# Altium PCB F4Test.PcbDoc
Units mil, origin at the board's own origin, x right, y up, seen from the top; angles counter-clockwise.
Board outline 1968.5 x 1968.5 mil, 4 copper layers (Top Layer, Internal Plane 1, Signal Layer 1, Bottom Layer), stack 64.634 mil thick; 127 components, 112 nets, 491 pads, 159 vias.
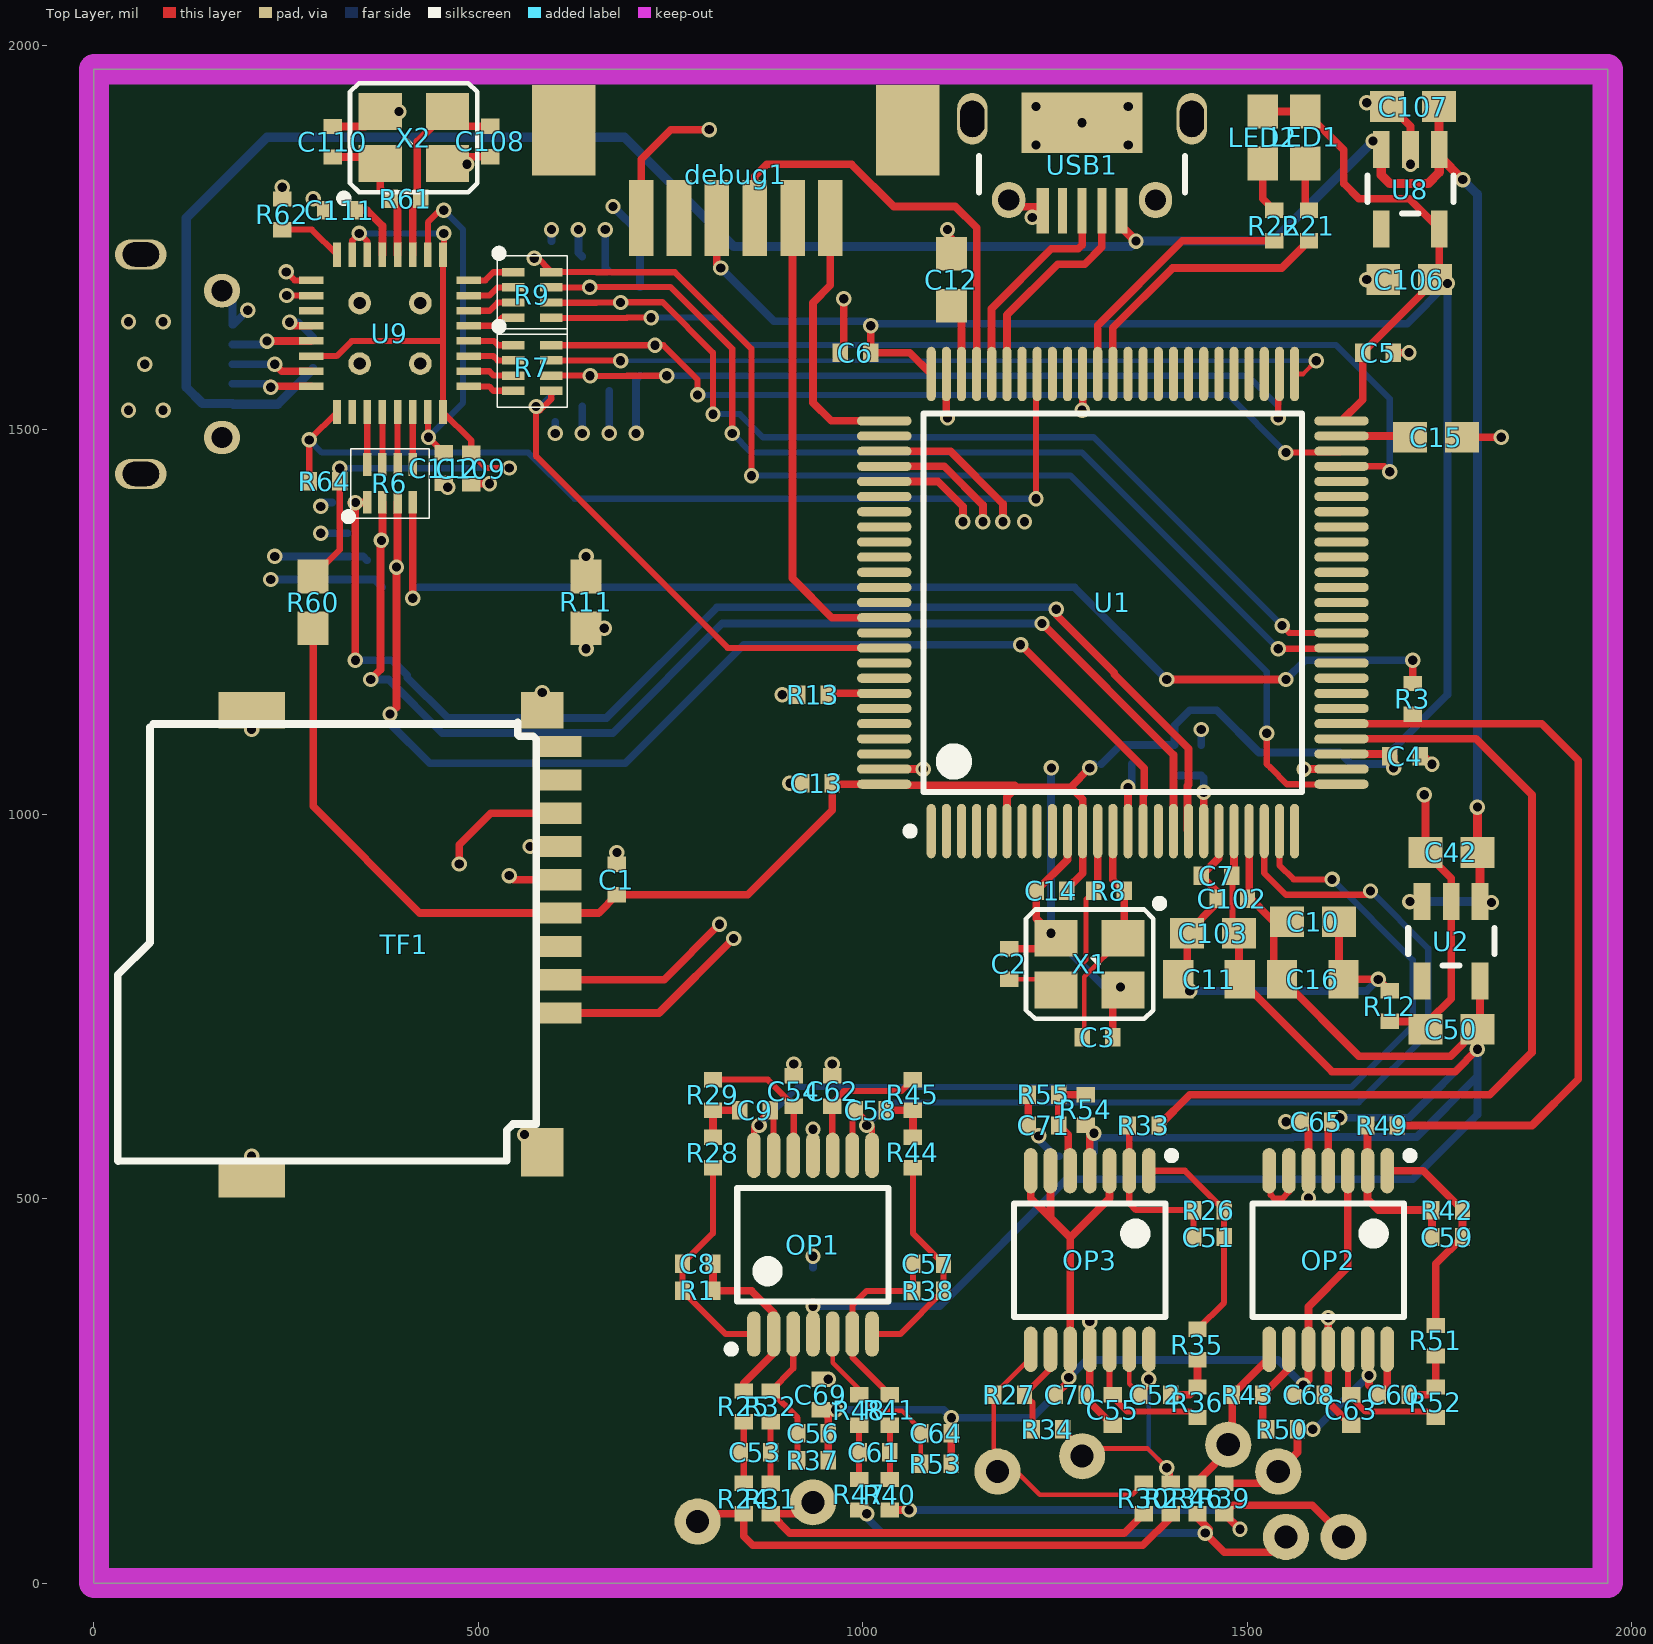
[diagram p0: Top Layer view]
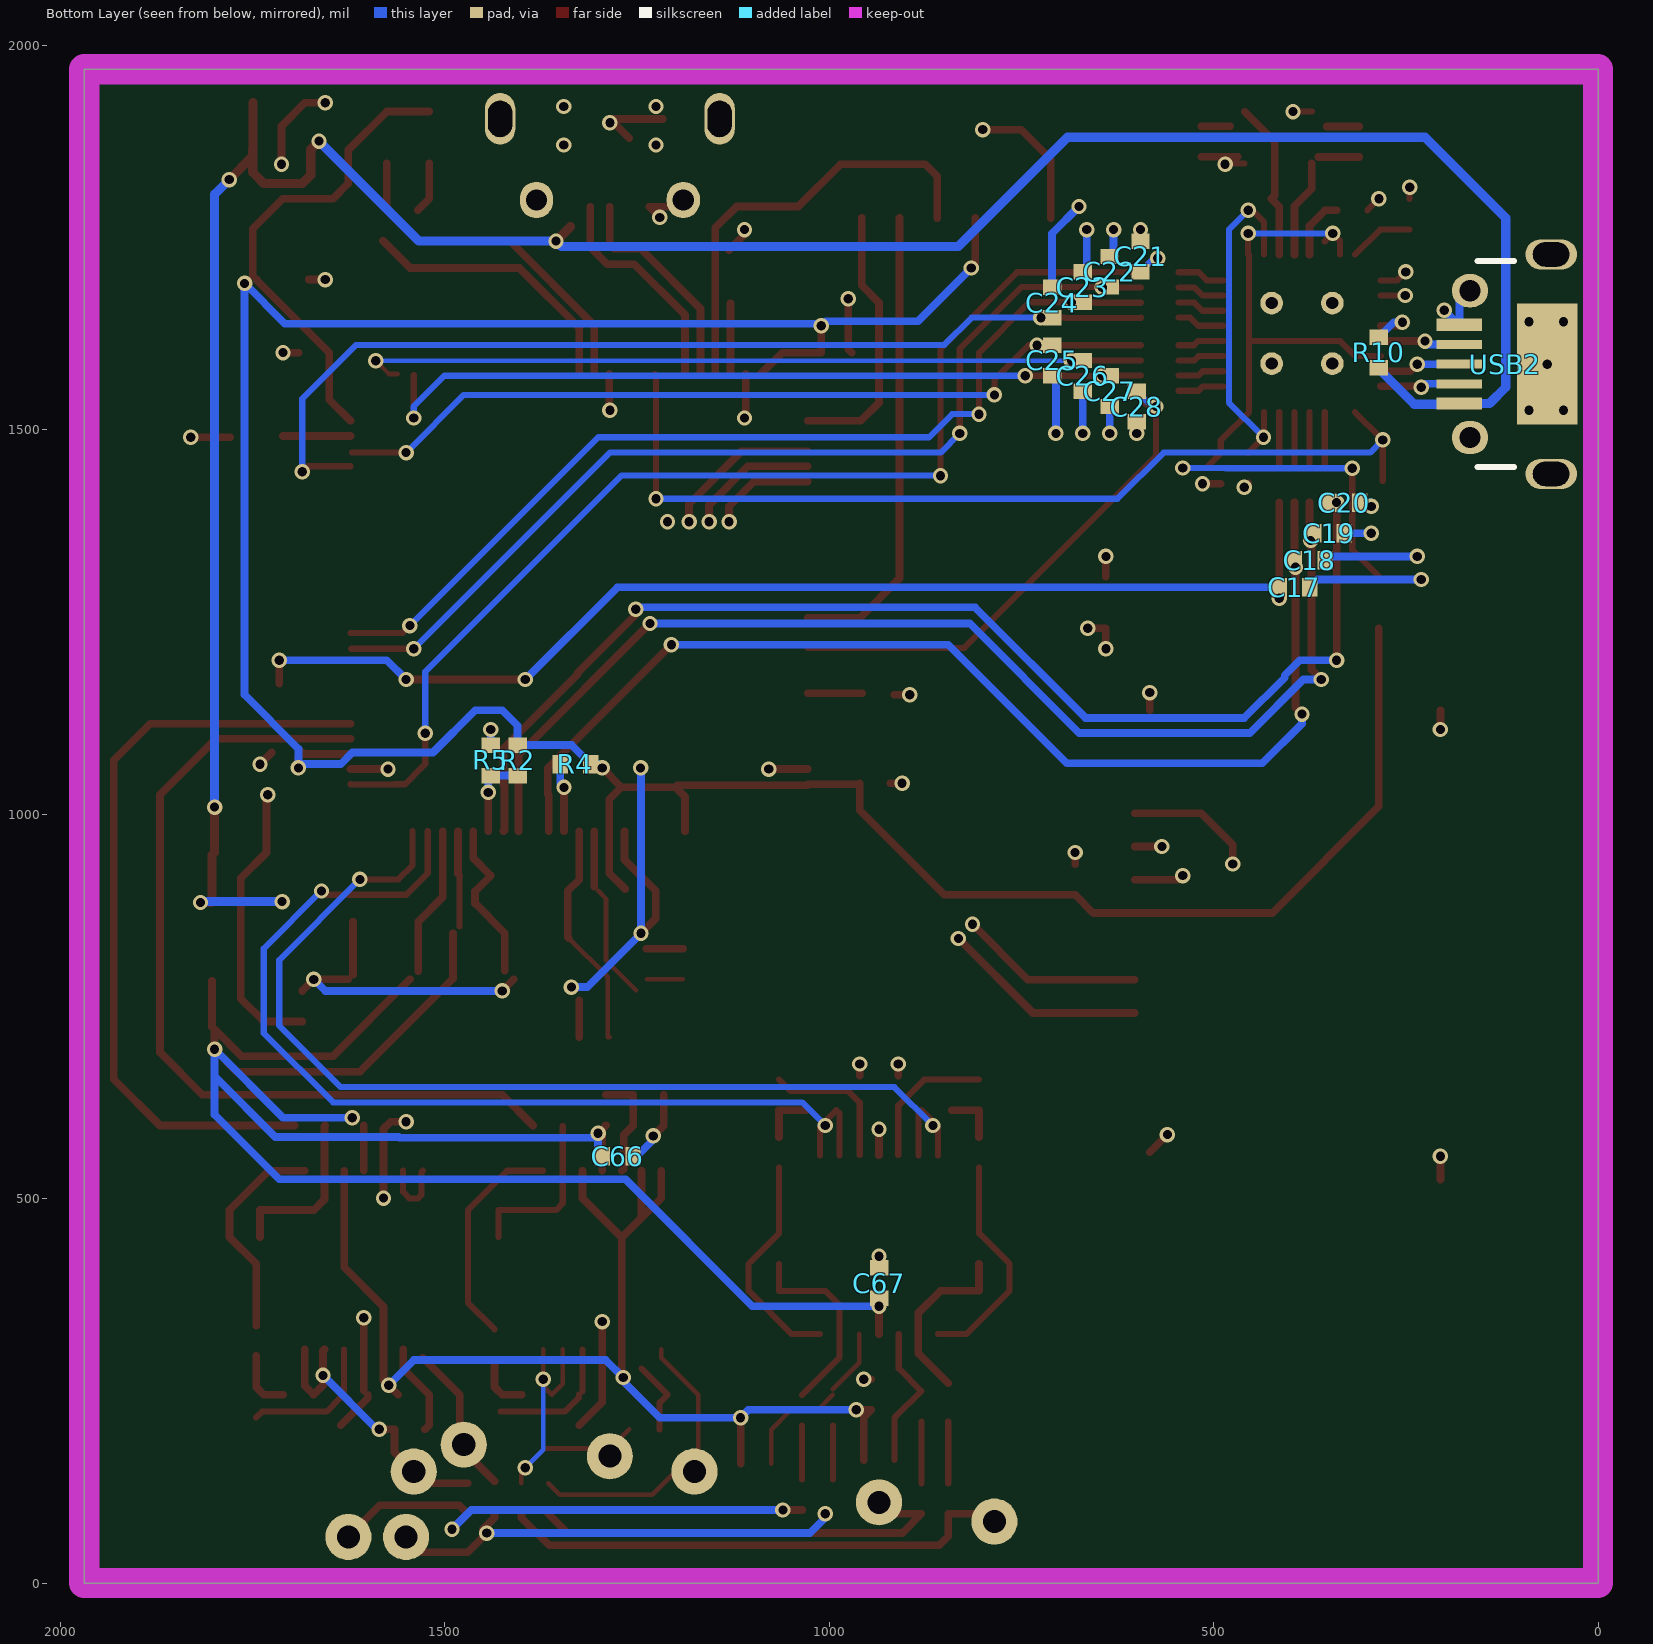
[diagram p1: Bottom Layer view, seen from below]
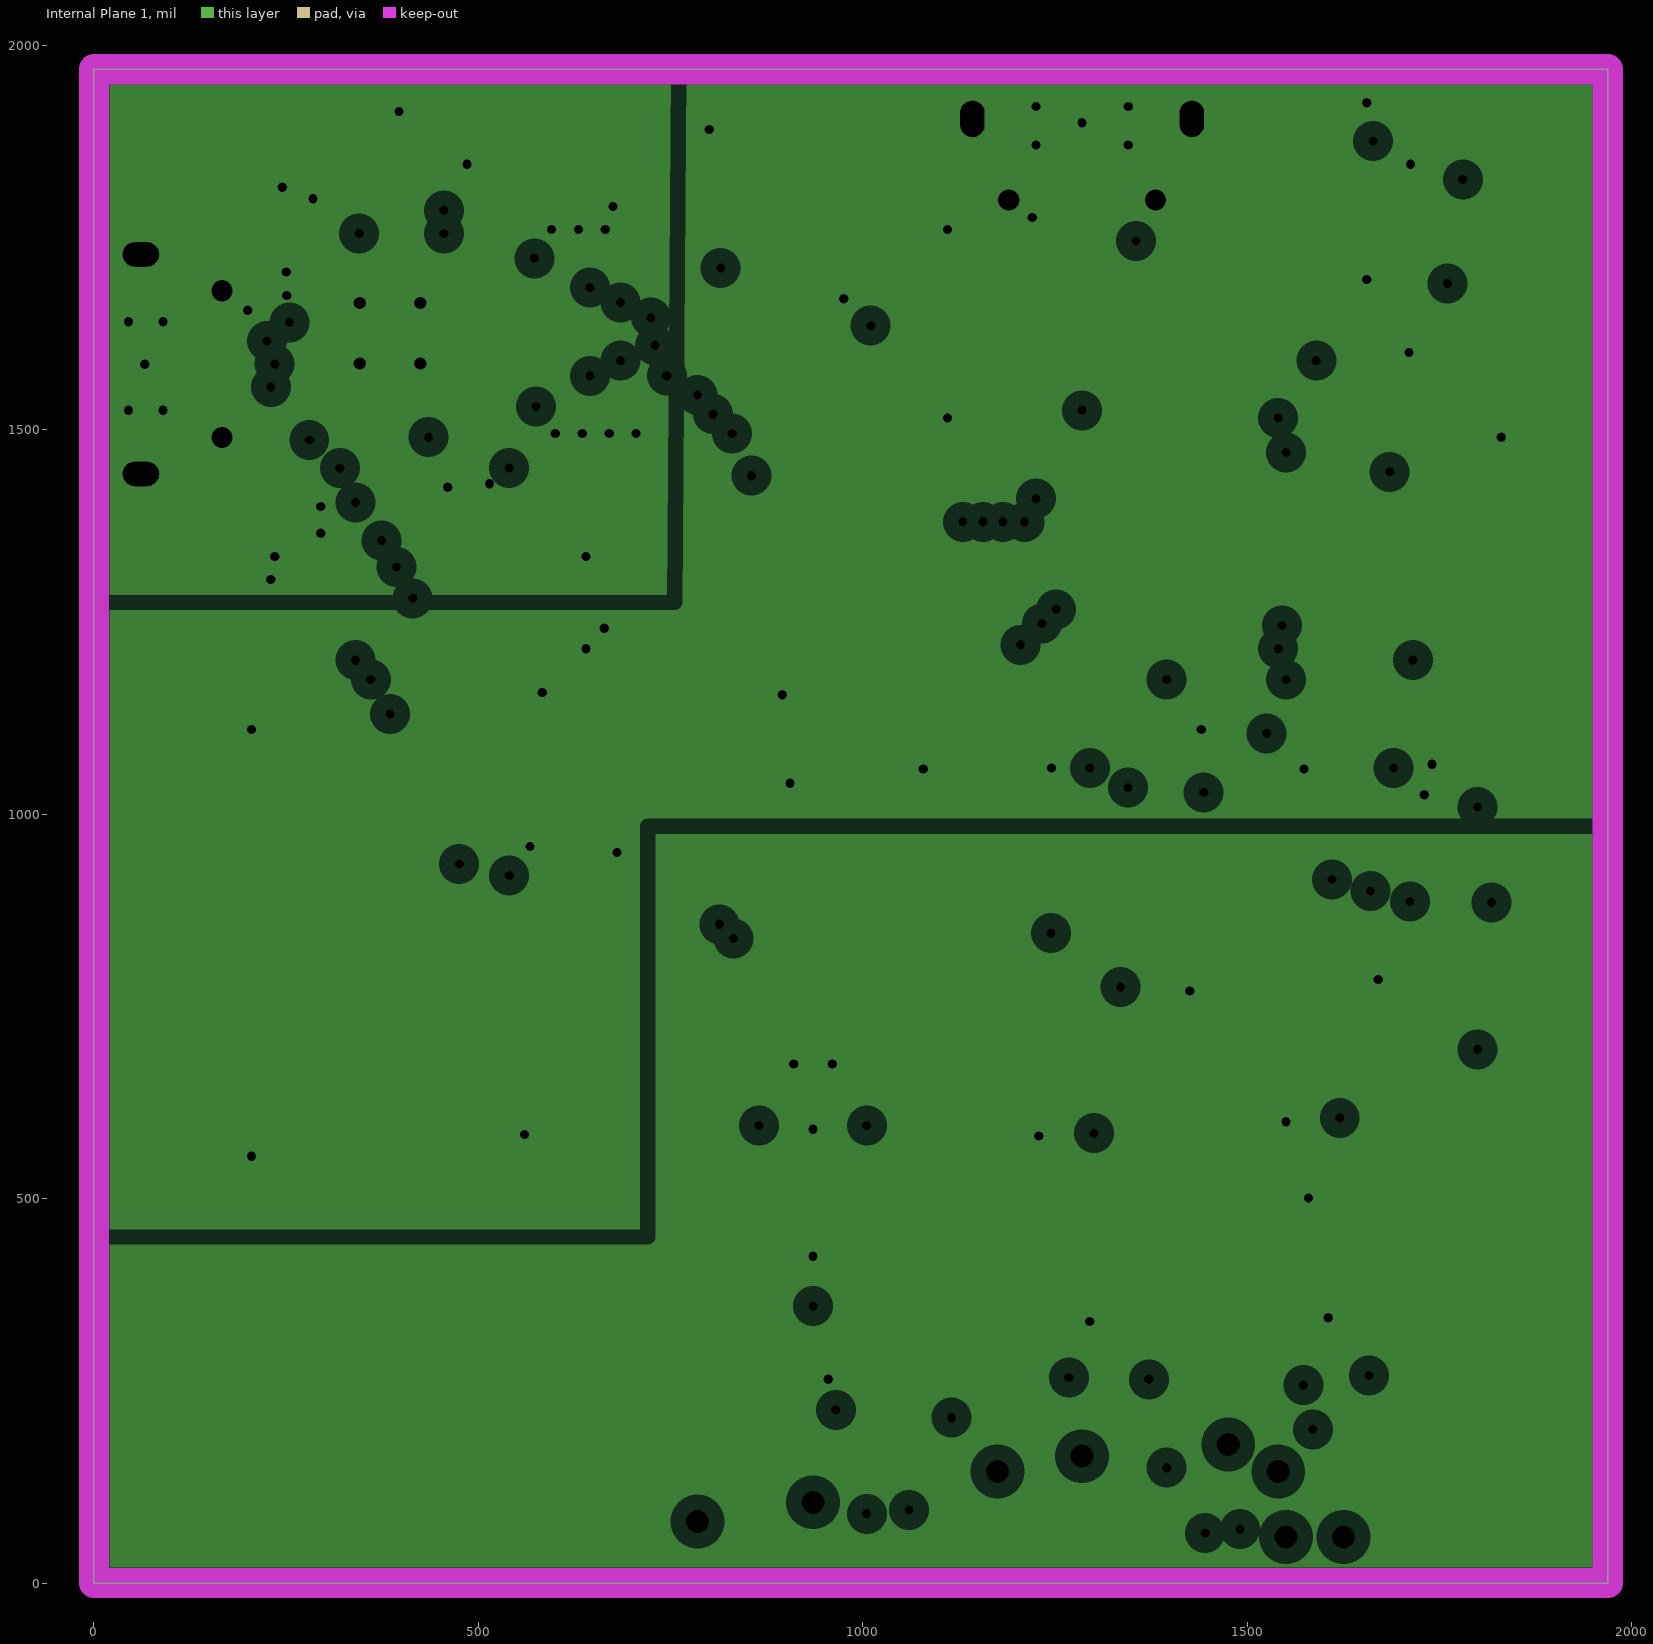
[diagram p2: Internal Plane 1, clearances drawn from the general rule]
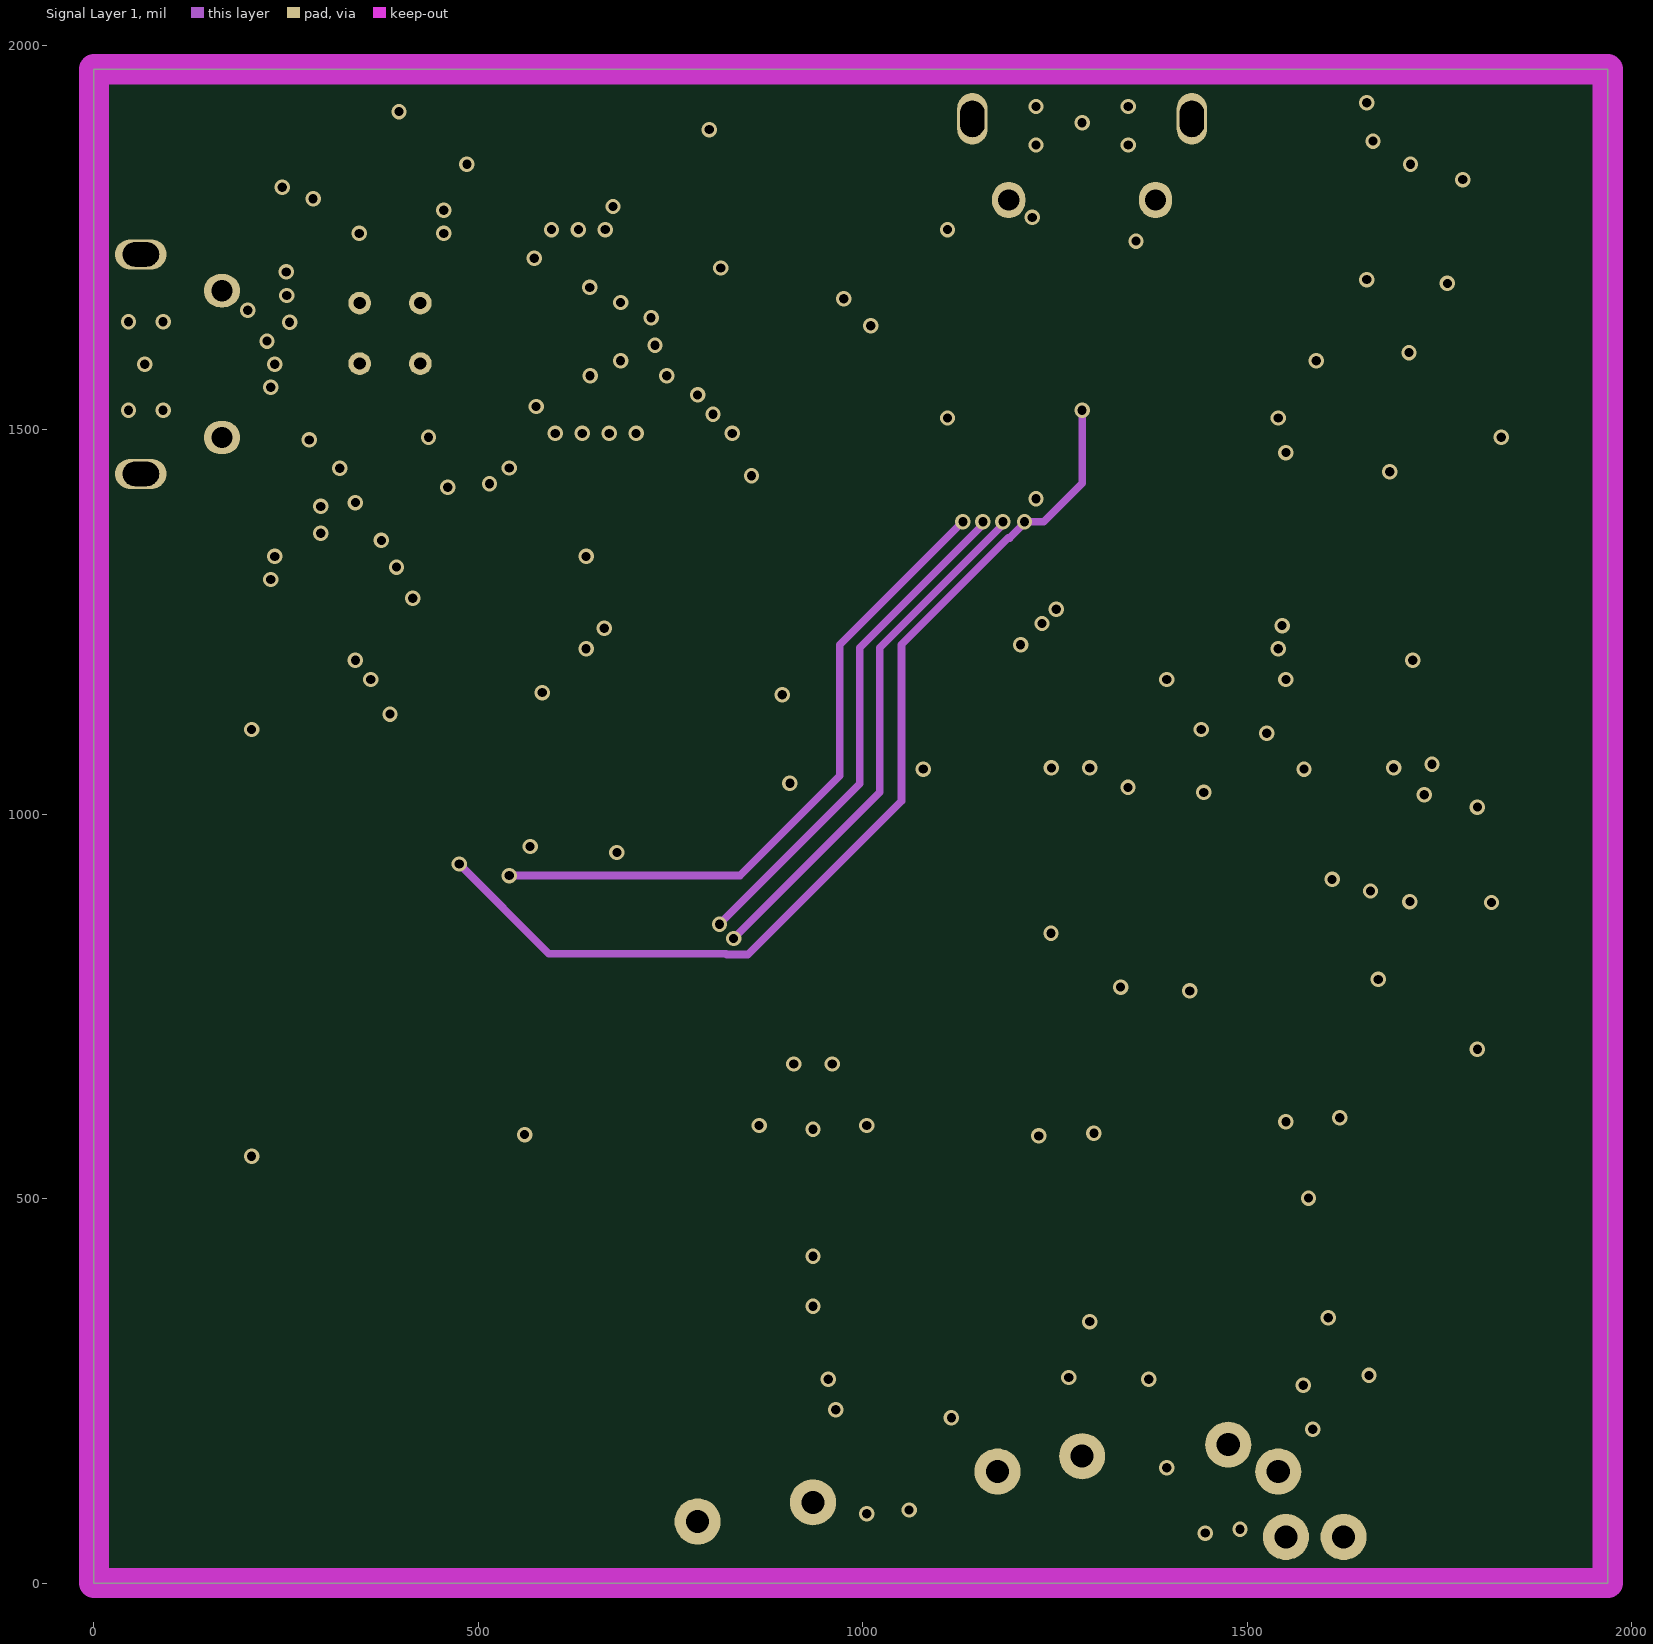
[diagram p3: Signal Layer 1]

## Layer stack, top to bottom
Top Solder: solder mask 0.4, Solder Resist, Dk 3.5
Top Layer: signal copper 1.4
Dielectric 1: core 6, FR-4, Dk 4.2
Internal Plane 1: plane copper 1.4169, net (Multiple Nets)
Dielectric 3: prepreg 47, Dk 4.2
Signal Layer 1: signal copper 1.4169
Dielectric 2: core 6, Dk 4.2
Bottom Layer: signal copper 1.4
Bottom Solder: solder mask 0.4, Solder Resist, Dk 3.5

## Board outline
0,0 1968.5,0 1968.5,1968.5 0,1968.5

## Design rules (kind name [scope] priority, off if disabled: settings)
Clearance [All] p1: gap=6
DiffPairsRouting [All] p1: maxlimit=10 minlimit=10 mostfreqgap=10 toplayer_minwidth=6 toplayer_maxwidth=15 toplayer_prefwidth=15 midlayer1_minwidth=6 midlayer1_maxwidth=15 midlayer1_prefwidth=15 bottomlayer_minwidth=6 bottomlayer_maxwidth=15 bottomlayer_prefwidth=15 maxuncoupledlength=500
MinimumSolderMaskSliver [All] p1 off: minsoldermaskwidth=10
PlaneClearance [All] p1: clearance=20
PlaneConnect [All] p1: planeconnectstyle=Direct reliefexpansion=20 reliefentries=4 reliefconductorwidth=10 reliefairgap=10
PolygonConnect [All] p1: connectstyle=Direct reliefconductorwidth=10 reliefentries=4 polygonreliefangle="90 Angle" airgapwidth=10
RoomDefinition mcu2 [InComponentClass('mcu2')] p1 off: confinementstyle=ConfineIn formatcopy=TRUE lockcomponents=FALSE outline 4045,-40 11430,-40 11430,360 4045,360
RoomDefinition USB_HS2 [InComponentClass('USB_HS2')] p2 off: confinementstyle=ConfineIn formatcopy=TRUE lockcomponents=FALSE outline 4090,1500 6900,1500 6900,3220 4090,3220
RoomDefinition IF [InComponentClass('IF')] p3 off: confinementstyle=ConfineIn formatcopy=TRUE lockcomponents=FALSE outline 4065,-2940 10325,-2940 10325,-1750 4065,-1750
RoutingVias [All] p1: holewidth=12 width=20 viastyle="Through Hole" minholewidth=12 minwidth=20 maxholewidth=28 maxwidth=50
SilkToBoardRegionClearance [All] p1 off:
SilkToSilkClearance [All] p1 off: silktosilkclearance=10
SilkToSolderMaskClearance [IsPad] p1 off: minsilkscreentomaskgap=10 clearancetoexposedcopper=TRUE
SolderMaskExpansion [All] p1: expansion=4
UnpouredPolygon [All] p1: allowunpoured=FALSE
Width [All] p1: maxlimit=60 minlimit=6 preferedwidth=6
22 further rules are at their usual default settings.

## Classes and differential pairs
component class USB_HS2: C17 C18 C19 C20 C21 C22 C23 C24 C25 C26 C27 C28 C108 C109 C110 C111 C112 R6 R7 R9 R10 R11 R60 R61 R62 R64 U9 USB2 X2
component class mcu2: C1 C2 C3 C4 C5 C6 C7 C10 C11 C12 C13 C14 C15 C16 C42 C50 C102 C103 C106 C107 debug1 LED1 LED2 R2 R3 R4 R5 R8 R12 R13 R21 R22 TF1 U1 U2 U8 USB1 X1
component class IF: C8 C9 C51 C52 C53 C54 C55 C56 C57 C58 C59 C60 C61 C62 C63 C64 C65 C66 C67 C68 C69 C70 C71 OP1 OP2 OP3 R1 R23 R24 R25 R26 R27 R28 R29 R30 R31 R32 R33 R34 R35 R36 R37 R38 R39 R40 R41 R42 R43 R44 R45 R46 R47 R48 R49 R50 R51 R52 R53 R54 R55
differential pair USB: +USB_P -USB_N

## Components (designator, comment, footprint, x,y, rotation, side; value= is the part's Value field where it differs from the comment)
C1 "0.1uF" 0402 680,915 r270 top
C2 "22pF" 0402 1190,805 r90 top
C3 "22pF" 0402 1305,710 r0 top
C4 "0.1uF * 5" 0402 1705,1075 r180 top
C5 "1n" 0402 1670,1600 r180 top
C6 "1n" 0402 990,1600 r0 top
C7 "1n" 0402 1460,920 r180 top
C8 "22pF" 0402 785,415 r0 top
C9 "430pF" 0402 860,615 r180 top
C10 "2.2uF" 0603 1585,860 r0 top
C11 "4.7uF" 0805 1450,785 r0 top
C12 "2.2uF" 0603 1115,1695 r270 top
C13 "1n" 0402 940,1040 r0 top
C14 "1n" 0402 1245,900 r0 top
C15 "2.2uF" 0603 1745,1490 r0 top
C16 "4.7uF" 0805 1585,785 r0 top
C17 "10pF/NC" 0402 395,1295 r180 bottom
C18 "1n" 0402 375,1330 r180 bottom
C19 "1n" 0402 350,1365 r180 bottom
C20 "1n" 0402 330,1405 r180 bottom
C21 "10pF/NC" 0402 595,1725 r90 bottom
C22 "1n" 0402 635,1705 r90 bottom
C23 "1n" 0402 670,1685 r90 bottom
C24 "1n" 0402 710,1665 r90 bottom
C25 "10pF/NC" 0402 710,1590 r270 bottom
C26 "1n" 0402 670,1570 r270 bottom
C27 "1n" 0402 635,1550 r270 bottom
C28 "1n" 0402 600,1530 r270 bottom
C42 "4.7uF" 0603 1765,950 r0 top
C50 "4.7uF" 0603 1765,720 r0 top
C51 "22pF" 0402 1450,450 r180 top
C52 "430pF" 0402 1380,245 r0 top
C53 "22pF" 0402 860,170 r0 top
C54 "100pF" 0402 910,640 r270 top
C55 "100pF" 0402 1325,225 r90 top
C56 "22pF" 0402 935,195 r0 top
C57 "22pF" 0402 1085,415 r180 top
C58 "430pF" 0402 1010,615 r0 top
C59 "22pF" 0402 1760,450 r180 top
C60 "430pF" 0402 1690,245 r0 top
C61 "22pF" 0402 1015,170 r180 top
C62 "100pF" 0402 960,640 r270 top
C63 "100pF" 0402 1635,225 r90 top
C64 "22pF" 0402 1095,195 r0 top
C65 "0.1uF" 0402 1590,600 r180 top
C66 "0.1uF" 0402 1275,555 r180 bottom
C67 "0.1uF" 0402 935,390 r90 bottom
C68 "0.1uF" 0402 1580,245 r0 top
C69 "0.1uF" 0402 945,245 r90 top
C70 "0.1uF" 0402 1270,245 r0 top
C71 "0.1uF" 0402 1235,595 r180 top
C102 "1n" 0402 1480,890 r0 top
C103 "2.2uF" 0603 1455,845 r0 top
C106 "4.7uF" 0603 1710,1695 r0 top
C107 "4.7uF" 0603 1715,1920 r0 top
C108 "10pF" 0402 515.63,1874.37 r90 top
C109 "1uF" 0402 490.63,1449.37 r270 top
C110 "10pF" 0402 310.63,1874.37 r270 top
C111 "1uF" 0402 320,1785 r180 top
C112 "1uF" 0402 455,1450 r270 top
debug1 "debug" WFRSM125 810,1775 r180 top
LED1 "LED0" 0603 1575,1880 r270 top
LED2 "LED0" 0603 1520,1880 r270 top
OP1 "MCP6024" TSSOP14_44MM_065P 935,440 r90 top
OP2 "MCP6024" TSSOP14_44MM_065P 1605,420 r270 top
OP3 "MCP6024" TSSOP14_44MM_065P 1295,420 r270 top
R1 "10k" 0402 785,380 r0 top
R2 "0R" 0402 1405,1070 r270 bottom
R3 "0R" 0402 1715,1150 r270 top
R4 "10k" 0402 1330,1065 r180 bottom
R5 "NC" 0402 1440,1070 r270 bottom
R6 "Res*4" 0402X4 385,1430 r90 top
R7 "Res*4" 0402X4 570,1580 r0 top
R8 "" 0402 1320,900 r180 top
R9 "Res*4" 0402X4 570,1675 r0 top
R10 "10k" 0402 285,1600 r90 bottom
R11 "0R" 0603 640,1275 r90 top
R12 "0R" 0402 1685,750 r90 top
R13 "10k" 0402 935,1155 r0 top
R21 "10k" 0402 1580,1765 r90 top
R22 "10k" 0402 1535,1765 r90 top
R23 "NC" 0402 1400,110 r90 top
R24 "5k" 0402 845,110 r270 top
R25 "5k" 0402 845,230 r270 top
R26 "10k" 0402 1450,485 r180 top
R27 "1k" 0402 1190,245 r0 top
R28 "787R" 0402 805,560 r270 top
R29 "1.33k" 0402 805,635 r270 top
R30 "NC" 0402 1365,110 r90 top
R31 "5k" 0402 880,110 r270 top
R32 "5k" 0402 880,230 r270 top
R33 "5k" 0402 1365,595 r0 top
R34 "1k" 0402 1240,200 r0 top
R35 "787R" 0402 1435,310 r90 top
R36 "1.33k" 0402 1435,235 r90 top
R37 "10k" 0402 935,160 r180 top
R38 "10k" 0402 1085,380 r180 top
R39 "NC" 0402 1470,110 r90 top
R40 "5k" 0402 1035,115 r270 top
R41 "5k" 0402 1035,225 r270 top
R42 "10k" 0402 1760,485 r180 top
R43 "1k" 0402 1500,245 r0 top
R44 "787R" 0402 1065,560 r270 top
R45 "1.33k" 0402 1065,635 r270 top
R46 "NC" 0402 1435,110 r90 top
R47 "5k" 0402 995,115 r270 top
R48 "5k" 0402 995,225 r270 top
R49 "5k" 0402 1675,595 r0 top
R50 "1k" 0402 1545,200 r0 top
R51 "787R" 0402 1745,315 r90 top
R52 "1.33k" 0402 1745,235 r90 top
R53 "10k" 0402 1095,155 r180 top
R54 "5k" 0402 1290,615 r90 top
R55 "5k" 0402 1235,635 r180 top
R60 "FB" 0603 285,1275 r90 top
R61 "1MR" 0402 405,1800 r0 top
R62 "12k 1%" 0402 245,1780 r270 top
R64 "10k" 0402 300,1432.95 r180 top
TF1 "TF" TF 205,1135 r270 top
U1 "STM32F427VGT6" LQFP100_N 1325,1275 r90 top
U2 "LP5907" SOT23-5 1765,835 r180 top
U8 "RT9193/RT9013/LP5907" SOT23-5 1712,1813 r180 top
U9 "USB3300_1" USB3300 385,1625 r0 top
USB1 "USB Micro Type B" MICRO-YZX 1285,2015 r180 top
USB2 "USB Micro Type B" MICRO-YZX -50,1585 r90 bottom
X1 "8mhz" OSCILLATOR-3.2X2.5 1295,805 r180 top
X2 "24mhz" OSCILLATOR-3.2X2.5 415.63,1879.37 r0 top

## Footprints (in the part's own frame and the unit in brackets; to place one, negate y for a bottom-side part, rotate by r counter-clockwise, add the part's x,y. Pads: shape width x height; smd on the part's side, far side on the other; paste and mask are expansions set on the pad)
0402 [mil] "0402-RES"
  rect 20x24 smd: 1(-19.68,0) 2(20,0)
0402X4 [mm]
  rect 0.75x0.28 smd: 1(-0.625,0.75) 2(-0.625,0.25) 3(-0.625,-0.25) 4(-0.625,-0.75) 5(0.625,-0.75) 6(0.625,-0.25) 7(0.625,0.25) 8(0.625,0.75)
  silkscreen extent -1.22,-1.3 1.15,1.5
0603 [mil] "0603-RES"
  rect 44x40 smd: 1(-33.46,0) 2(34,0)
0805 [mil]
  rect 39.37x50 smd: 1(-40,0) 2(40,0)
  body extent -50,-30 50,30, height 31
LQFP100_N [mm]
  oval 1.8x0.3 smd: 1(-7.55,6) 2(-7.55,5.5) 3(-7.55,5) 4(-7.55,4.5) 5(-7.55,4) 6(-7.55,3.5) 7(-7.55,3) 8(-7.55,2.5) 9(-7.55,2) 10(-7.55,1.5) 11(-7.55,1) 12(-7.55,0.5) 13(-7.55,0) 14(-7.55,-0.5) 15(-7.55,-1) 16(-7.55,-1.5) 17(-7.55,-2) 18(-7.55,-2.5) 19(-7.55,-3) 20(-7.55,-3.5) 21(-7.55,-4) 22(-7.55,-4.5) 23(-7.55,-5) 24(-7.55,-5.5) 25(-7.55,-6) 51(7.55,-6) 52(7.55,-5.5) 53(7.55,-5) 54(7.55,-4.5) 55(7.55,-4) 56(7.55,-3.5) 57(7.55,-3) 58(7.55,-2.5) 59(7.55,-2) 60(7.55,-1.5) 61(7.55,-1) 62(7.55,-0.5) 63(7.55,0) 64(7.55,0.5) 65(7.55,1) 66(7.55,1.5) 67(7.55,2) 68(7.55,2.5) 69(7.55,3) 70(7.55,3.5) 71(7.55,4) 72(7.55,4.5) 73(7.55,5) 74(7.55,5.5) 75(7.55,6)
  oval 0.3x1.8 smd: 26(-6,-7.55) 27(-5.5,-7.55) 28(-5,-7.55) 29(-4.5,-7.55) 30(-4,-7.55) 31(-3.5,-7.55) 32(-3,-7.55) 33(-2.5,-7.55) 34(-2,-7.55) 35(-1.5,-7.55) 36(-1,-7.55) 37(-0.5,-7.55) 38(0,-7.55) 39(0.5,-7.55) 40(1,-7.55) 41(1.5,-7.55) 42(2,-7.55) 43(2.5,-7.55) 44(3,-7.55) 45(3.5,-7.55) 46(4,-7.55) 47(4.5,-7.55) 48(5,-7.55) 49(5.5,-7.55) 50(6,-7.55) 76(6,7.55) 77(5.5,7.55) 78(5,7.55) 79(4.5,7.55) 80(4,7.55) 81(3.5,7.55) 82(3,7.55) 83(2.5,7.55) 84(2,7.55) 85(1.5,7.55) 86(1,7.55) 87(0.5,7.55) 88(0,7.55) 89(-0.5,7.55) 90(-1,7.55) 91(-1.5,7.55) 92(-2,7.55) 93(-2.5,7.55) 94(-3,7.55) 95(-3.5,7.55) 96(-4,7.55) 97(-4.5,7.55) 98(-5,7.55) 99(-5.5,7.55) 100(-6,7.55)
  silkscreen extent -7.67,-6.25 6.25,6.82
MICRO-YZX [mm]
  rect 0.4x1.5 smd: 1(-1.3,5.85) 5(1.3,5.85)
  rect 0.3x1.5 smd: 2(-0.65,5.85) 3(0,5.85) 4(0.65,5.85)
  oval 1x1.7 hole 0.8 slot 1.2 at 90 deg: 5(-3.625,2.82) 5(3.625,2.82)
  oval 1.1x1.2 hole 0.7: 5(-2.425,5.5) 5(2.425,5.5)
  rect 4x2 smd: 5(0,2.95)
  silkscreen extent -3.4,4.05 3.4,5.25
OSCILLATOR-3.2X2.5 [mil] "OSCILLATOR-3.2X2.5"
  rect 56x48 smd: 1(-43.31,-33.46) 2(44,-33.46) 3(44,34) 4(-43.31,34)
  silkscreen extent -95,-83 83,71
SOT23-5 [mil] "SOT23-5"
  rect 22x48 smd: 1(-37.4,-51.18) 2(0,-51.18) 3(38,-51.18) 4(38,52) 5(-37.4,52)
  silkscreen extent -56,-17 56,32
TF [mm]
  rect 0.7x1.6 smd: 1(10,10.1) 2(8.9,10.1) 3(7.8,10.1) 4(6.7,10.1) 5(5.6,10.1) 6(4.5,10.1) 7(3.4,10.1) 8(2.3,10.1) 9(1.2,10.1)
  rect 1.2x1.4 smd: SHELL(0,9.6)
  rect 1.2x2.2 smd: SHELL(0,0) SHELL(15.5,0)
  rect 1.6x1.4 smd: SHELL(14.6,9.6)
  silkscreen extent 0.41,-4.42 14.9,9.4
TSSOP14_44MM_065P [mm]
  oval 1.5x0.45 smd: 1(-2.95,1.95) 2(-2.95,1.3) 3(-2.95,0.65) 4(-2.95,0) 5(-2.95,-0.65) 6(-2.95,-1.3) 7(-2.95,-1.95) 8(2.95,-1.95) 9(2.95,-1.3) 10(2.95,-0.65) 11(2.95,0) 12(2.95,0.65) 13(2.95,1.3) 14(2.95,1.95)
  silkscreen extent -3.57,-2.5 1.88,2.82
USB3300 [mm]
  round 0.75 hole 0.4: 0(-1,-1) 0(-1,1) 0(1,-1) 0(1,1)
  rect 0.8x0.25 smd: 1(-2.6,1.75) 2(-2.6,1.25) 3(-2.6,0.75) 4(-2.6,0.25) 5(-2.6,-0.25) 6(-2.6,-0.75) 7(-2.6,-1.25) 8(-2.6,-1.75) 17(2.6,-1.75) 18(2.6,-1.25) 19(2.6,-0.75) 20(2.6,-0.25) 21(2.6,0.25) 22(2.6,0.75) 23(2.6,1.25) 24(2.6,1.75)
  rect 0.25x0.8 smd: 9(-1.75,-2.6) 10(-1.25,-2.6) 11(-0.75,-2.6) 12(-0.25,-2.6) 13(0.25,-2.6) 14(0.75,-2.6) 15(1.25,-2.6) 16(1.75,-2.6) 25(1.75,2.6) 26(1.25,2.6) 27(0.75,2.6) 28(0.25,2.6) 29(-0.25,2.6) 30(-0.75,2.6) 31(-1.25,2.6) 32(-1.75,2.6)
  body extent -2.5,-2.5 2.5,2.5, height 0.85
WFRSM125 [mm]
  rect 0.81x2.5 smd: 1(-3.75,0) 2(-2.5,0) 3(-1.25,0) 4(0,0) 5(1.25,0) 6(2.5,0)
  rect 2.1x3 smd: shell(-6.3,-2.9) shell(5.05,-2.9)
  body extent -6.79,-3.82 5.46,0.38, height 3.4

## Part data
C1 C2 C3 C4 C5 C6 C7 C8 C9 C10 C12 C13 C14 C15 C17 C18 C19 C20 C21 C22 C23 C24 C25 C26 C27 C28 C51 C52 C53 C54 C55 C56 C57 C58 C59 C60 C61 C62 C63 C64 C65 C66 C67 C68 C69 C70 C71 C102 C103 C108 C109 C110 C111 C112: library part CAP0402-CAP, "<b>Capacitor</b> / Standard 0603 ceramic capacitor, and 0.1\" leaded capacitor."
C11 C16 C42 C50 C106 C107: library part Cap, "Capacitor"
LED1 LED2: "Typical INFRARED GaAs LED"
OP1 OP2 OP3: library part OP-SOP14
R1 R2 R3 R4 R5 R8 R10 R11 R12 R13 R21 R22 R23 R24 R25 R26 R27 R28 R29 R30 R31 R32 R33 R34 R35 R36 R37 R38 R39 R40 R41 R42 R43 R44 R45 R46 R47 R48 R49 R50 R51 R52 R53 R54 R55 R60 R61 R62 R64: library part Res2, "Resistor"
R6 R7 R9: "Resistor"
U1: library part STM32F103VBT6, "STM32 ARM-based 32-bit MCU with 64 Kbytes Flash, 100-pin LQFP, Industrial Temperature"
U8: library part LP5907
USB1 USB2: library part USB_Micro_TypeB, "Connector SMD USB Micro Type B middle mount"
X1 X2: library part OSCILLATOR-3.2X2.5, "Crystal Oscillator in 3.2x2.5 SMD"

## Free pads (board coordinates)
  round 60 hole 30: 2(1550,60) 3(1625,60) 4(1175,145) 5(1285,165) 6(1475,180) 7(1540,145) 8(935,105) 9(785,80)

## Via types
v1: diameter 20, hole 12, Top Layer to Bottom Layer, 159 vias

## Nets (pads, with @x,y where several pads share a name; then routed paths per layer and width w, separated by ;. In a path a pad name is that pad's centre, name@x,y a point inside that pad or via, vN(x,y) a via of type N, cw(c..) or ccw(c..) an arc to the next point about the centre after c; other vN are vias at no path point)
3.3A: C7.1 C10.1 C11.2 C16.1 C50.2 C65.1 C66.1 C67.1 C102.2 C103.2 OP1.4 OP2.4 OP3.4 R54.1 U1.21 U1.22 U2.5 | length 3132.9
  Top Layer w8: C7.1 1480.31,919.37 C103.2@1480.31,853.68
  Top Layer w10: OP1.4 v1(935,360) ; R54.1 R54.1@1295,590.32 ; OP3.4 R54.1@1295,590.32 ; v1(1300.31,585) R54.1@1295,590.32 ; C7.1@1482.48,922.8 U1.21 ; C11.2@1489,786 C103.2 ; C11.2 1610,665 1770,665 v1(1799,694) C50.2 1764,685 1645,685 C16.1 ; U1.22 1502.17,892.17 1534.33,860 C16.1@1534.33,795.67 ; OP2.4 C65.1@1605,595.32 ; C50.2@1802.4,723.4 U2.5
  Bottom Layer w10: v1(935,360) 1099.69,360 1264.69,525 1715,525 1799,609 1799,659 ; C66.1@1300.31,560.63 v1(1300.31,585) 1306.31,579 1558.7,579 1559.7,580 1720,580 1799,659 ; v1(1620,605) 1710,605 v1(1799,694) 1799,659
3.3D: C1.2 C4.2 C5.2 C6.2 C13.2 C14.2 C106.2 debug1.4 LED1.1 LED2.1 R2.1 R4.2 R60.1 TF1.4 U1.6 U1.11 U1.28 U1.50 U1.75 U1.100 U8.5 | length 4611.8
  Top Layer w10: R60.1 285,1010 423.78,871.22 TF1.4 656.22,871.22 C1.2 850,895 960,1005 C13.2 ; debug1.4 810,1715 v1(815,1710) ; C13.2@961.22,1038.78 U1.100 1027.76,1037.46 1197.54,1037.46 1200,1035 ; v1(1010,1635) C6.2 1061.02,1600 U1.75 ; U1.6 1187.2,1022.2 1200,1035 ; C14.2@1265,902.56 1285.63,923.19 U1.11 1285.63,1019.37 1270,1035 ; v1(1295,1060) 1270,1035 ; LED2.1 LED1.1 1625,1863.46 1625,1820 1645,1800 1710.4,1800 U8.5 C106.2@1749.4,1700.4 ; U1.28 C4.2@1683.15,1078.15 ; U1.50 1650,1538.98 C5.2 1744,1694 C106.2 ; C4.2@1685,1080 1690,1075 v1(1690,1060) ; 1200,1035 1270,1035
  Bottom Layer w10: v1(815,1710) 884.32,1640.69 1004.32,1640.69 v1(1010,1635) 1012.54,1637.54 1707.54,1637.54 v1(1760,1690) 1760,1155 1690,1085 1690,1065 1635,1065 1620,1080 1552.46,1080 1515,1080 1460,1135 1425,1135 1405,1115 R2.1 1334.69,1089.69 R4.2 ; v1(1295,1060) R4.2@1300,1065
3.3PHY: C109.1 R60.2 R64.1 U9.6 U9.16 U9.25 U9.30 U9.31 | length 1071.4
  Top Layer w8: U9.6 315.47,1595.47 335,1615 453.9,1615 ; R60.2 319.68,1343.69 R64.1 v1(319.68,1449.69) ; U9.31 335.79,1745.79 340,1750 v1@350,1750 ; v1(345,1755) v1@350,1750 ; 355.47,1744.53 v1@350,1750 ; U9.25 453.9,1615 ; U9.25@455,1728.46 v1(455,1755) ; v1(540,1450) 509.68,1450 C109.1 490.63,1485.91 U9.16 453.9,1615
  Bottom Layer w8: v1(319.68,1449.69) 484.68,1449.69 485,1450 v1(540,1450) ; v1(345,1755) v1(455,1755)
5V: C42.2 C107.2 R10.1 U2.1 U2.3 U8.1 U8.3 USB1.1 USB2.1 | length 3488.6
  Top Layer w12: USB1.1@1336.18,1763.82 v1(1355,1745) ; v1(1663.19,1875) U8.3 1674,1831 1685,1820 1735,1820 1749.4,1834.4 U8.1 ; v1(1711.19,886.18) U2.3 ; U8.1@1749,1864.59 C107.2@1749,1925 ; U8.1@1750,1855 v1(1780,1825) ; C42.2 v1(1799,1009) ; U2.1 C42.2@1802.4,946.6 ; U2.1@1803.59,885 v1(1817.37,885)
  Bottom Layer w12: R10.1@285,1578.89 239.11,1533 181.13,1533 USB2.1 141.18,1533.82 120,1555 120,1775 225,1880 690,1880 832,1738 1348,1738 v1(1355,1745) 1533.19,1745 v1(1663.19,1875) ; v1(1711.19,886.18) 1816.19,886.18 v1(1817.37,885) ; v1(1780,1825) 1799,1806 v1(1799,1009)
AGND: C7.2 C10.2 C11.1 C16.2 C54.1 C55.1 C62.1 C63.1 C65.2 C66.2 C67.2 C68.2 C69.2 C70.2 C71.2 C102.1 C103.1 OP1.11 OP2.5 OP2.11 OP3.11 R12.2 R55.2 U1.20 | length 1231.5
  Top Layer w10: C54.1 v1(910,675) ; OP1.11 v1(935,590) ; C69.2 v1(955,265) ; C62.1 v1(960,675) ; R55.2 C71.2 1225,585 1225.19,585 v1(1228.69,581.51) ; v1(1295,340) OP3.11 1295,235.32 C55.1 ; C11.1 v1(1425,770) ; C11.1@1421.54,796.54 C103.1 1460.31,883.78 C102.1 1460.31,899.68 C7.2 1462.8,942.8 U1.20 ; v1(1550,600) C65.2 1579.41,590.59 OP2.5 v1(1579.41,500.59) ; C68.2 1600,240.32 C63.1 ; C68.2@1605,250 OP2.11 v1(1605,345) ; C16.2@1619,791 C10.2 ; C16.2 v1(1670,785) R12.2
  Bottom Layer w10: C67.2 v1(935,425) ; v1(1228.69,581.51) 1228.69,576.31 1250,555 C66.2 ; v1(1425,770) 1655,770 v1(1670,785)
GND: C1.1 C2.2 C3.2 C4.1 C5.1 C6.1 C12.1 C13.1 C14.1 C15.2 C42.1 C50.1 C106.1 C107.1 debug1.6 R5.1 R11.1 R12.1 R13.1 TF1.6 TF1.SHELL U1.10 U1.27 U1.74 U1.99 U2.2 U8.2 USB1.5 X1.2 X1.4 | length 2066.7
  Top Layer w10: TF1.SHELL@205,524.76 v1(205,555) ; v1(205,1110) TF1.SHELL@205,1135 ; v1(560,583.15) TF1.SHELL@582.95,560.2 ; v1(567.17,957.83) TF1.6 ; TF1.SHELL@582.95,1135 v1(582.95,1157.95) ; v1(640,1215) R11.1 v1(663.46,1241.54) ; C1.1 v1(680,950) ; debug1.6 711.57,1851.57 750,1890 v1(800,1890) ; v1(895,1155) R13.1 ; v1(905,1040) C13.1 ; C6.1 975,1604.69 v1(975,1670) ; U1.99 v1(1078.46,1058.46) ; v1@1108.46,1516.54 U1.74 ; v1(1110,1760) 1110,1753.46 C12.1@1130,1733.46 ; C2.2 X1.2@1237.54,825 ; USB1.5@1203.31,1789.69 1233.82,1789.69 v1(1220,1775.87) ; USB1.5@1216.14,1903.86 1285,1903.86 USB1.5@1260,1878.86 ; X1.2 v1(1244.46,845) 1225.31,864.15 C14.1 1265.94,940.63 U1.10 ; C3.2 X1.4@1325,757.69 ; v1(1573.46,1058.46) U1.27 ; v1(1655,1695) C106.1 ; v1(1655,1925) 1681.54,1925 1712,1894.54 U8.2 v1(1712,1845) ; R12.1 1735.31,730.32 1765,760 U2.2 1765,916.54 C42.1 1731.54,1023.46 v1(1730,1025) ; C5.1 v1(1710,1600) ; C4.1@1724.69,1080 v1(1740,1064.69) ; C15.2 v1(1830,1490)
  Bottom Layer w10: v1(1245,1060) 1244.46,1059.46 v1(1244.46,845) 1314.46,775 v1(1335,775) ; R5.1 v1(1440,1110)
  other v1: 1110,1515 1225,1870 1345,1870 1285,1898.86 1225,1920 1345,1920
GND_PHY: C17.2 C18.2 C19.2 C20.2 C21.2 C22.2 C23.2 C24.2 C25.2 C26.2 C27.2 C28.2 C108.1 C109.2 C110.1 C111.2 C112.2 R11.2 R62.1 U9.0 U9.1 U9.2 USB2.5 X2.2 X2.4 | length 1105.2
  Top Layer w8: R62.1 v1(245,1815) ; v1(250,1705) 261.1,1693.9 U9.1 ; v1(250.79,1674.21) U9.2 ; v1(285,1800) C111.2 ; X2.4 v1(396.63,1913.37) ; X2.2 489.09,1845.91 488.19,1845 v1(485,1845)
  Top Layer w10: C110.1 X2.4@353.01,1894.06 ; C112.2 v1(460,1425) ; X2.2@468.41,1854.69 C108.1 ; C109.2 v1(514.37,1429.37) ; R11.2 v1(640,1335)
  Bottom Layer w10: USB2.5@180.32,1666.69 180.32,1636.18 181.18,1636.18 v1(200,1655) ; v1(230,1305) 365,1305 C17.2 ; v1(235,1335) 350,1335 C18.2 ; v1(295,1365) C19.2 ; v1(295,1400) 295,1405 C20.2 ; C21.2 v1(595,1760) ; v1(600,1495) C28.2 ; v1(630,1760) 630,1730 C22.2 ; v1(635,1495) C27.2 ; v1(665,1760) 665,1710 C23.2 ; v1(670,1495) C26.2 ; v1(675,1790) 710,1755 C24.2 ; v1(705,1495) 705,1565 C25.2
  other v1: 45,1525 90,1525 66.14,1585 45,1640 90,1640
NetC2_1: C2.1 R8.2 U1.12 X1.3 | length 268.4
  Top Layer w6: C2.1 X1.3@1236.69,785.32 ; X1.3 1290,810 1290,890 R8.2
  Top Layer w10: R8.2@1305.31,905.32 U1.12
NetC3_1: C3.1 R8.1 U1.13 X1.1 | length 297.9
  Top Layer w6: C3.1 1288,710 1288,788.16 X1.1
  Top Layer w10: U1.13 1325,914.68 R8.1 1339.69,839.84 X1.1
NetC8_1: C8.1 OP1.1 R1.1 R28.2 | length 292.6
  Top Layer w8: R28.2 805,454.68 C8.1 R1.1 821.46,323.86 OP1.1
NetC8_2: C8.2 OP1.2 R1.2 R25.1 | length 233
  Top Layer w10: C8.2 R1.2 855,380 883.82,351.18 OP1.2 883.82,298.82 845,260
NetC9_1: C9.1 OP1.13 OP1.14 U1.24 | length 1384
  Top Layer w8: OP1.14 858.23,593.54 v1@862.34,597.66 ; v1(865,595) v1@862.34,597.66 ; C9.1 v1@862.34,597.66 ; OP1.13 C9.1@883.82,610.87 ; U1.24 1541.54,933.46 1560,915 v1(1610,915)
  Bottom Layer w8: v1(865,595) 915,645 1635,645 1715,725 1715,810 v1(1610,915)
NetC9_2: C9.2 R28.1 R29.2 | length 70.3
  Top Layer w10: R28.1 R29.2 C9.2
NetC12_2: C12.2 U1.73 | length 91.9
  Top Layer w10: U1.73 C12.2@1128.15,1664.15
NetC15_1: C15.1 U1.49 | length 87.8
  Top Layer w10: U1.49 C15.1@1710,1491.54
NetC17_1: C17.1 R3.1 R6.4 | length 1515.6
  Top Layer w10: v1(414.53,1280.47) R6.4 ; v1(1395,1175) v1(1550,1175) ; R3.1 v1(1715,1200)
  Bottom Layer w10: C17.1 1275,1295 v1(1395,1175) ; v1(1550,1175) 1575,1200 v1(1715,1200)
NetC18_1: C18.1 R6.3 U1.15 | length 1496.7
  Top Layer w10: 393.53,1138.53 v1(393.53,1321.1) 393.9,1321.1 v1@394.84,1320.16 ; R6.3 v1@394.84,1320.16 ; v1@395,1320 v1@394.84,1320.16 ; v1(1205,1220) 1365.69,1059.31 1365.69,1025.99 1364.37,1024.67 U1.15
  Bottom Layer w10: v1(385,1130) 385,1117.55 436.61,1065.94 690.94,1065.94 845,1220 v1(1205,1220)
NetC19_1: C19.1 R6.2 U1.17 | length 1551.2
  Top Layer w10: v1(360,1175) 372.53,1187.53 372.53,1354.47 v1(373.84,1355.78) 373.84,1351.47 375.16,1350.16 R6.2 ; v1(1232.84,1247.84) 1403.74,1076.94 U1.17
  Signal Layer 1 w10: v1(373.84,1355.78) v1@375,1354.63
  Bottom Layer w10: v1(360,1175) 383.23,1175 452.92,1105.31 674.64,1105.31 817.16,1247.84 v1(1232.84,1247.84)
NetC20_1: C20.1 R6.1 U1.18 | length 1591.2
  Top Layer w10: v1@335,1405 v1(340,1405) ; v1(340,1200) v1(340,1405) ; R6.1 355.08,1405 v1(340,1405) ; v1(1251.22,1266.22) 1251.22,1259.15 1326.76,1183.62 1326.76,1181.76 1423.43,1085.09 1423.43,1038.12 1422.11,1036.81 1422.11,979.07 U1.18
  Bottom Layer w10: v1(340,1200) 387.93,1200 407.62,1180.31 407.62,1177.38 460,1125 666.48,1125 810.32,1268.84 1248.61,1268.84 v1(1251.22,1266.22)
NetC21_1: C21.1 R9.8 U1.26 | length 1532.1
  Top Layer w8: v1(572.69,1722.69) 575,1725 594.61,1705.39 R9.8@594.61,1704.84 ; R9.8 R9.8@594.61,1704.84 ; v1(855,1440) 855,1605 755.47,1704.53 653.44,1704.53 653.13,1704.84 R9.8@594.61,1704.84 ; v1(1525,1105) 1525,1065 1530,1060 1551.22,1038.78 1564.87,1038.78 1565.18,1038.46 1621.93,1038.46 U1.26
  Bottom Layer w8: v1(572.69,1722.69) 577.63,1722.69 C21.1 ; v1(855,1440) 1270,1440 1525,1185 v1(1525,1105)
NetC22_1: C22.1 R9.7 U1.35 | length 1286
  Top Layer w8: R9.7 v1(644.84,1684.84) 645.16,1685.16 749.84,1685.16 830,1605 v1(830,1495) ; v1(1540,1215) U1.35@1621.3,1215
  Bottom Layer w8: v1(830,1495) 855,1470 1285,1470 v1(1540,1215)
NetC23_1: C23.1 R9.6 U1.36 | length 1253.1
  Top Layer w8: R9.6 594.61,1664.84 653.13,1664.84 653.44,1665.16 v1(684.84,1665.16) 685.16,1665.47 739.53,1665.47 805,1600 v1(805,1520) ; v1(1545,1245) 1554.37,1235.63 U1.36
  Bottom Layer w8: v1(805,1520) 840,1520 870,1490 1300,1490 v1(1545,1245)
NetC24_1: C24.1 R9.5 U1.47 | length 1285.1
  Top Layer w8: R9.5 594.61,1645.16 693.13,1645.16 693.44,1645.47 v1(724.53,1645.47) ; U1.47 1677.83,1452.17
  Bottom Layer w8: v1(724.53,1645.47) 814.53,1645.47 850,1610 1615,1610 1685,1540 v1(1685,1445)
NetC25_1: C25.1 R7.8 U1.48 | length 1095.3
  Top Layer w8: R7.8 v1(729.53,1609.53) 740.47,1609.53 785,1565 v1(785,1545) ; v1(1550,1470) U1.48@1620.39,1470
  Bottom Layer w8: v1(785,1545) 1475,1545 v1(1550,1470)
NetC26_1: C26.1 R7.7 U1.51 | length 1030.9
  Top Layer w6: U1.51 1572.24,1572.24 v1(1589.53,1589.53)
  Top Layer w8: R7.7 684.84,1589.84 v1(684.84,1589.53)
  Signal Layer 1 w8: v1(684.84,1589.53) v1@685,1589.69
  Bottom Layer w6: v1(684.84,1589.53) v1(1589.53,1589.53)
NetC27_1: C27.1 R7.6 U1.52 | length 1042.6
  Top Layer w8: R7.6 649.84,1570.16 649.53,1569.84 v1(645.22,1569.84) 645.53,1569.53 693.13,1569.53 693.44,1569.84 693.6,1570 v1(745,1570) ; v1(1540,1515) U1.52@1540,1570.71
  Signal Layer 1 w8: v1(645.22,1569.84) v1@645.37,1570
  Bottom Layer w8: v1(745,1570) 1500,1570 1500.16,1569.84 1540,1530 v1(1540,1515)
NetC28_1: C28.1 R7.5 U1.91 | length 692.7
  Top Layer w8: R7.5 594.61,1539.61 580,1525 v1(575,1530) 575,1465 824.06,1215.94 U1.91
  Bottom Layer w8: v1(575,1530) 580.32,1530 C28.1
NetC51_1: C51.1 OP3.1 R26.1 R35.2 | length 288.5
  Top Layer w8: OP3.1 1418.54,536.14 R26.1 C51.1 1469.69,364.68 R35.2
NetC51_2: C51.2 OP3.2 R26.2 R33.1 | length 222.8
  Top Layer w8: R33.1@1346.18,594.13 OP3.2 1346.18,493.82 1355,485 R26.2 C51.2
NetC52_1: C52.1 OP3.13 OP3.14 pad.5 R23.2 R34.2 | length 430.7
  Top Layer w6: R34.2 1285,175 1370,175 v1(1395,150) 1400,145 R23.2 ; OP3.13 1346.18,259.13 C52.1 1371.77,256.46 v1(1371.77,265) OP3.14
  Bottom Layer w6: v1(1371.77,265) 1371.77,173.23 v1(1395,150)
NetC52_2: C52.2 R35.1 R36.2 | length 74.5
  Top Layer w10: C52.2 1425,245 R36.2 R35.1
NetC53_1: C53.1 R24.1 R25.2 | length 80.3
  Top Layer w8: R24.1 R25.2
NetC53_2: C53.2 R31.1 R32.2 | length 80.3
  Top Layer w8: R31.1 C53.2 R32.2
NetC54_2: C54.2 OP1.12 R29.1 | length 183.1
  Top Layer w8: R29.1 876.14,654.68 910,620.83 C54.2 OP1.12@910,556.73
NetC55_2: C55.2 OP3.12 R36.1 | length 168
  Top Layer w8: C55.2@1320.59,249.41 OP3.12 ; C55.2 1325,241.46 1343.46,223 R36.1@1427.31,223
NetC56_1: C56.1 OP1.3 R32.1 R37.2 | length 190.5
  Top Layer w8: OP1.3 909.41,279.09 R32.1 915,214.68 R37.2
NetC57_1: C57.1 OP1.7 R38.1 R44.2 | length 292.6
  Top Layer w8: OP1.7 1048.54,323.86 R38.1 C57.1 1065,454.68 R44.2
NetC57_2: C57.2 OP1.6 R38.2 R41.1 | length 258.3
  Top Layer w8: R41.1 986.18,293.5 OP1.6 986.18,361.18 1005,380 R38.2 C57.2
NetC58_1: C58.1 OP1.8 OP1.9 U1.23 | length 1328.5
  Top Layer w8: OP1.9 C58.1@986.18,610.87 ; C58.1 v1@1007.66,597.66 ; v1(1005,595) v1@1007.66,597.66 ; OP1.8 1011.77,593.54 v1@1007.66,597.66 ; U1.23 1521.85,923.15 1550,895 1655,895 v1(1660,900)
  Bottom Layer w8: v1(1005,595) 1035,625 1645,625 1735,715 1735,825 v1(1660,900)
NetC58_2: C58.2 R44.1 R45.2 | length 70.3
  Top Layer w10: C58.2 R45.2 R44.1
NetC59_1: C59.1 OP2.1 R42.1 R51.2 | length 283.5
  Top Layer w10: OP2.1 1728.54,536.14 R42.1 C59.1 1745,415.32 R51.2
NetC59_2: C59.2 OP2.2 R42.2 R49.1 | length 221.1
  Top Layer w10: R49.1 1656.18,594.13 OP2.2 1656.18,498.82 1670,485 R42.2 C59.2
NetC60_1: C60.1 OP2.13 OP2.14 pad.7 R39.2 R50.2 | length 391.9
  Top Layer w10: R39.2 1525,130 1565,170 R50.2 v1(1585,200) ; OP2.13 1658,302.04 v1(1658,270) 1658,257.32 C60.1 1681.77,256.46 OP2.14
  Bottom Layer w10: v1(1585,200) 1588,200 v1(1658,270)
NetC60_2: C60.2 R51.1 R52.2 | length 79.5
  Top Layer w10: C60.2 1735,245 R52.2 R51.1
NetC61_1: C61.1 R40.1 R41.2 | length 70.3
  Top Layer w8: R40.1 R41.2
NetC61_2: C61.2 R47.1 R48.2 | length 70.3
  Top Layer w8: R47.1 C61.2 R48.2
NetC62_2: C62.2 OP1.10 R45.1 | length 185.4
  Top Layer w8: OP1.10@960,556.73 C62.2 960,624.68 975,639.68 976.14,639.68 976.46,640 1050.32,640 R45.1
NetC63_2: C63.2 OP2.12 R52.1 | length 178.8
  Top Layer w8: C63.2@1630.59,249.41 OP2.12 ; C63.2 1635,241.46 1653.46,223 1737.31,223 R52.1
NetC64_1: C64.1 OP1.5 R48.1 R53.2 | length 229.9
  Top Layer w6: OP1.5 960.59,286.28 R48.1@995,251.87 ; R48.1 1015.68,224 1050.73,224 1075.32,199.41 C64.1 1075.32,155.32 R53.2
NetC71_1: C71.1 OP3.5 R54.2 R55.1 | length 140.3
  Top Layer w10: OP3.5 1267,538.55 1267,582.68 C71.1 R55.1 R54.2
NetC108_2: C108.2 R61.2 U9.27 X2.3 | length 245.4
  Top Layer w10: U9.27 414.53,1789.53 R61.2 420.63,1804.37 420.63,1874.46 459.54,1913.37 X2.3 ; X2.3@478.63,1894.37 C108.2
NetC110_2: C110.2 R61.1 U9.28 X2.1 | length 181.1
  Top Layer w10: C110.2 X2.1@363.86,1854.37 ; X2.1 372.32,1812.99 R61.1 394.84,1790.47 U9.28
NetC111_1: C111.1 U9.29 | length 81.3
  Top Layer w10: C111.1 355,1785 375.16,1764.84 U9.29
NetC112_1: C112.1 U9.15 U9.26 | length 455.1
  Top Layer w8: U9.15 434.21,1490.47 v1@435,1489.69 ; U9.26 434.21,1769.21 450,1785 v1(455,1785) ; v1(435,1490) v1@435,1489.69 ; C112.1 v1@435,1489.69
  Bottom Layer w8: v1(435,1490) 480,1535 480,1760 v1(455,1785)
Netdebug1_1: debug1.1 U1.76 | length 352
  Top Layer w10: debug1.1 957.64,1687.64 935,1665 935,1535 958.78,1511.22 U1.76
Netdebug1_2: debug1.2 U1.89 | length 609
  Top Layer w10: debug1.2 908.43,1306.57 959.68,1255.31 U1.89
Netdebug1_3: debug1.3 U1.72 | length 573.6
  Top Layer w10: debug1.3 859.21,1829.21 875,1845 985,1845 1040,1790 1120,1790 1147.83,1762.17 U1.72
NetLED1_2: LED1.2 R21.2 | length 56
  Top Layer w10: R21.2@1575,1790 LED1.2
NetLED2_2: LED2.2 R22.2 | length 67.2
  Top Layer w10: LED2.2 1520,1800 R22.2
NetOP2_6: OP2.6 OP2.7 | length 88.7
  Top Layer w8: OP2.7 1530,534.37 1530,505 1535,500 1545,500 1553.82,508.82 OP2.6
NetOP2_8: OP2.8 pad.6 R43.1 R46.2 | length 199
  Top Layer w10: R46.2@1435,132.56 1480.31,177.87 R43.1 OP2.8@1528.23,292.91
NetOP2_9: OP2.9 R43.2 R50.1 | length 120.1
  Top Layer w10: R50.1 1520,205.32 R43.2 1553.82,278.82 OP2.9
NetOP3_8: OP3.8 pad.4 R27.1 R30.2 | length 374.6
  Top Layer w6: OP3.8 1218.23,292.91 R27.1 1170.31,174.68 1230,115 1350,115 R30.2
NetOP3_9: OP3.9 R27.2 R34.1 | length 97.1
  Top Layer w8: R34.1 1220.31,234.68 R27.2 OP3.9@1243.82,278.82
NetR2_2: R2.2 R5.2 U1.19 | length 108.5
  Top Layer w10: U1.19 v1(1443.11,1028.11)
  Bottom Layer w10: R2.2 R5.2 1443.11,1046.89 v1(1443.11,1028.11)
NetR3_2: R3.2 R49.2 U1.30 | length 1002.3
  Top Layer w10: U1.30 1882.48,1117.52 1930,1070 1930,655 1870,595 R49.2
NetR4_1: R4.1 U1.14 | length 89.3
  Top Layer w10: U1.14 v1(1344.69,1034.69)
  Bottom Layer w10: v1(1344.69,1034.69) 1349.69,1039.69 R4.1
NetR6_5: R6.5 U9.14 | length 68
  Top Layer w8: R6.5 U9.14
NetR6_6: R6.6 U9.13 | length 68
  Top Layer w8: R6.6 U9.13
NetR6_7: R6.7 U9.12 | length 68
  Top Layer w8: R6.7 U9.12
NetR6_8: R6.8 U9.11 | length 68
  Top Layer w8: R6.8 U9.11
NetR7_1: R7.1 U9.20 | length 60.4
  Top Layer w8: U9.20 519.84,1615.16 525.47,1609.53 R7.1
NetR7_2: R7.2 U9.19 | length 60.4
  Top Layer w8: U9.19 519.53,1595.47 525.16,1589.84 R7.2
NetR7_3: R7.3 U9.18 | length 60.4
  Top Layer w8: U9.18 514.21,1575.79 519.84,1570.16 R7.3
NetR7_4: R7.4 U9.17 | length 60.4
  Top Layer w8: U9.17 513.9,1556.1 519.53,1550.47 R7.4
NetR9_1: R9.1 U9.24 | length 62.4
  Top Layer w8: U9.24 508.9,1693.9 519.53,1704.53 R9.1
NetR9_2: R9.2 U9.23 | length 62.4
  Top Layer w8: U9.23 514.21,1674.21 524.84,1684.84 R9.2
NetR9_3: R9.3 U9.22 | length 62.4
  Top Layer w8: U9.22 514.53,1654.53 525.16,1665.16 R9.3
NetR9_4: R9.4 U9.21 | length 62.4
  Top Layer w8: U9.21 519.84,1634.84 530.47,1645.47 R9.4
NetR10_2: R10.2 U9.4 | length 69.2
  Top Layer w10: v1(254.43,1639.43) 255,1640 260.16,1634.84 U9.4
  Bottom Layer w10: v1(254.43,1639.43) 265.57,1639.43 R10.2
NetR13_2: R13.2 U1.94 | length 70.9
  Top Layer w10: R13.2@956.89,1156.89 U1.94
NetR21_1: R21.1 U1.63 | length 361.9
  Top Layer w10: U1.63 1325,1632.37 1402.63,1710 1544.69,1710 R21.1
NetR22_1: R22.1 U1.64 | length 338.3
  Top Layer w10: U1.64 1305.31,1635.31 1415.31,1745.31 R22.1
NetR23_1: pad.9 R23.1 R24.2 | length 659.2
  Top Layer w10: pad.9@795,90 R24.2 845,60.93 856.93,49 1364,49 1400,85 R23.1
NetR30_1: pad.8 R30.1 R31.2 | length 545.8
  Top Layer w10: pad.8@920,90 R31.2 905,65 1339.69,65 R30.1
NetR33_2: R33.2 U1.29 | length 1137.5
  Top Layer w10: R33.2 1425,635 1815,635 1870,690 1870,1025 1797.17,1097.83 1739.41,1097.83 1739.24,1098 1622.24,1098 U1.29
NetR39_1: pad.3 R39.1 R40.2 | length 670.8
  Top Layer w10: R40.2 v1(1060,95) ; v1(1490.31,70) R39.1 1480.69,101 1584,101 pad.3
  Bottom Layer w10: v1(1060,95) 1465.31,95 v1(1490.31,70)
NetR46_1: pad.2 R46.1 R47.2 | length 582.2
  Top Layer w10: R46.1 1435,85 1450,70 v1(1445,65) 1470,40 pad.2@1530,40
  Bottom Layer w10: v1(1005,90) 1005,85 1025,65 v1(1445,65)
NetR62_2: R62.2 U9.32 | length 84.6
  Top Layer w8: R62.2 283.46,1760 U9.32
NetR64_2: R64.2 U1.68 U9.9 | length 1244.2
  Top Layer w8: R64.2 v1(280,1486.54) U9.9 ; v1(1225,1410) 1225,1570.67 U1.68
  Bottom Layer w8: v1(280,1486.54) 296.54,1470 565,1470 625,1410 v1(1225,1410)
NetU1_7: U1.7
NetU1_8: U1.8
NetU1_9: U1.9
NetU1_25: U1.25
NetU1_32: U1.32
NetU1_33: U1.33
NetU1_34: U1.34
NetU1_37: U1.37
NetU1_53: U1.53
NetU1_90: U1.90
NetU9_5: U9.5 USB2.4 | length 104.2
  Top Layer w10: v1(225,1615) 282.48,1615 U9.5
  Bottom Layer w10: USB2.4 220.59,1610.59 v1(225,1615)
NetU9_7: U9.7 USB2.3 | length 106.1
  Top Layer w10: v1(235,1585) 244.21,1575.79 U9.7
  Bottom Layer w10: USB2.3 v1(235,1585)
NetU9_8: U9.8 USB2.2 | length 110.8
  Top Layer w10: v1(230,1555) 230,1560 233.9,1556.1 U9.8
  Bottom Layer w10: USB2.2 225.59,1559.41 v1(230,1555)
PC8: TF1.7 U1.65 | length 1544.8
  Top Layer w10: v1(475,935) 475,960 516.14,1001.14 TF1.7 ; v1(1285,1525) 1285.63,1525.63 U1.65
  Signal Layer 1 w10: v1(475,935) 591.57,818.43 821.87,818.43 823.07,817.23 850.37,817.23 1050,1016.86 1050,1220 1189,1359 1190.7,1359 1210,1378.3 v1(1210,1380) 1235,1380 1285,1430 v1(1285,1525)
PC9: U1.66
PC10: TF1.1 U1.78 | length 1162.3
  Top Layer w10: TF1.1 734.84,741.3 v1(831.77,838.23) ; U1.78 1113.83,1471.85 1182,1403.68 v1(1182,1380)
  Signal Layer 1 w10: v1(831.77,838.23) 1022,1028.46 1022,1216.3 1182,1376.3 v1(1182,1380)
PC11: TF1.2 U1.79 | length 1076.8
  Top Layer w10: TF1.2 741.38,784.61 v1(813.38,856.62) ; U1.79 1105.67,1452.17 1156,1401.84 v1(1156,1380)
  Signal Layer 1 w10: v1(813.38,856.62) 996,1039.23 996,1216.3 1156,1376.3 v1(1156,1380)
PC12: TF1.5 U1.80 | length 1080.7
  Top Layer w10: v1(540,920) 545.47,914.53 TF1.5 ; U1.80 1097.52,1432.48 1130,1400 v1(1130,1380)
  Signal Layer 1 w10: v1(540,920) 840,920 970,1050 970,1220 v1(1130,1380)
PD2: U1.83
USB_N: U1.70 USB1.2 | length 289.1
  Top Layer w10: U1.70 1187.2,1648.92 1253.28,1715 1288.28,1715 1310.59,1737.31 USB1.2@1310.59,1789.69
USB_P: U1.71 USB1.3 | length 286.7
  Top Layer w10: U1.71@1167.2,1572.24 1167.2,1657.2 1245,1735 1280,1735 1285,1740 USB1.3@1285,1789.69
VREF: C56.2 C64.2 C68.1 C69.1 C70.1 OP2.3 OP2.10 OP3.3 OP3.6 OP3.7 OP3.10 R37.1 R53.1 | length 1620.2
  Top Layer w10: R37.1 954.68,215.63 C69.1 v1(964.68,225.32) ; R53.1 1115,155.32 C64.2 v1(1115,215) ; OP3.7 1218.23,500.59 1243.82,475 ; OP3.6 1243.82,475 ; C70.1 1269.41,264.09 OP3.10 1269.41,449.41 ; OP3.3 1320.59,500.59 1269.41,449.41 ; C68.1 v1(1572.66,257.34) 1579.41,264.09 OP2.10 1579.41,359.41 1630.59,410.59 OP2.3 ; 1243.82,475 1269.41,449.41
  Bottom Layer w10: v1(964.68,225.32) 1104.69,225.32 v1(1115,215) 1220,215 1270,265 v1(1267.69,267.31) 1290.37,290 1540,290 v1(1572.66,257.34)
pads on no net: debug1.5 debug1.shell TF1.3 TF1.8 TF1.9 U1.1 U1.2 U1.3 U1.4 U1.5 U1.16 U1.31 U1.38 U1.39 U1.40 U1.41 U1.42 U1.43 U1.44 U1.45 U1.46 U1.54 U1.55 U1.56 U1.57 U1.58 U1.59 U1.60 U1.61 U1.62 U1.67 U1.69 U1.77 U1.81 U1.82 U1.84 U1.85 U1.86 U1.87 U1.88 U1.92 U1.93 U1.95 U1.96 U1.97 U1.98 U2.4 U8.4 U9.3 U9.10 USB1.4

## Polygon pours and split planes (outlines as drawn)
GND_PHY on Internal Plane 1 (split plane): 745.45,1285.09 20.1,1285.09 20.1,1948.41 750.24,1948.41
AGND on Internal Plane 1 (split plane): 1948.41,20.1 20.1,20.1 20.1,439.91 720,439.91 722.61,440.26 725.04,441.26 727.13,442.87 728.74,444.96 729.74,447.39 730.09,450 730.09,974.17 1948.41,974.17
GND on Internal Plane 1 (split plane): 1948.41,994.34 720,994.34 717.39,993.99 714.96,992.99 712.87,991.38 711.26,989.3 710.26,986.86 709.91,984.25 709.91,460.09 20.1,460.09 20.1,1264.91 755.47,1264.91 756.74,1265.08 758.01,1265.24 758.04,1265.25 758.08,1265.26 759.26,1265.75 760.45,1266.23 760.48,1266.25 760.51,1266.27 761.53,1267.05 762.55,1267.82 762.57,1267.85 762.6,1267.87 763.38,1268.89 764.17,1269.89 764.18,1269.93 764.2,1269.96 764.69,1271.14 765.19,1272.32 765.2,1272.36 765.21,1272.39 765.38,1273.66 765.55,1274.93 770.41,1948.41 1948.41,1948.41

## Keep-outs
Keep-Out Layer:
  the board outline again, w39.37

## Other copper
Internal Plane 1 (plane layer: these items are gaps in the copper):
  lines w20: 0,450 720,450 720,984.25 1968.5,984.25 ; 0,1275 755.47,1275 760.44,1965

## Text inside footprints (layer, text, board x,y; h text height)
R6: Mechanical 1 "R1" at 392.84,1437.09 h11.81 r180
R7: Mechanical 1 "R1" at 577.09,1572.16 h11.81 r90
R9: Mechanical 1 "R1" at 577.09,1667.16 h11.81 r90